# Altium PCB optical_sensor_v1.1.PcbDoc
Units mm, origin at the board's own origin, x right, y up, seen from the top; angles counter-clockwise.
Board outline 29.57 x 17.04 mm, 2 copper layers (Top Layer, Bottom Layer); 20 components, 24 nets, 92 pads, 52 vias.
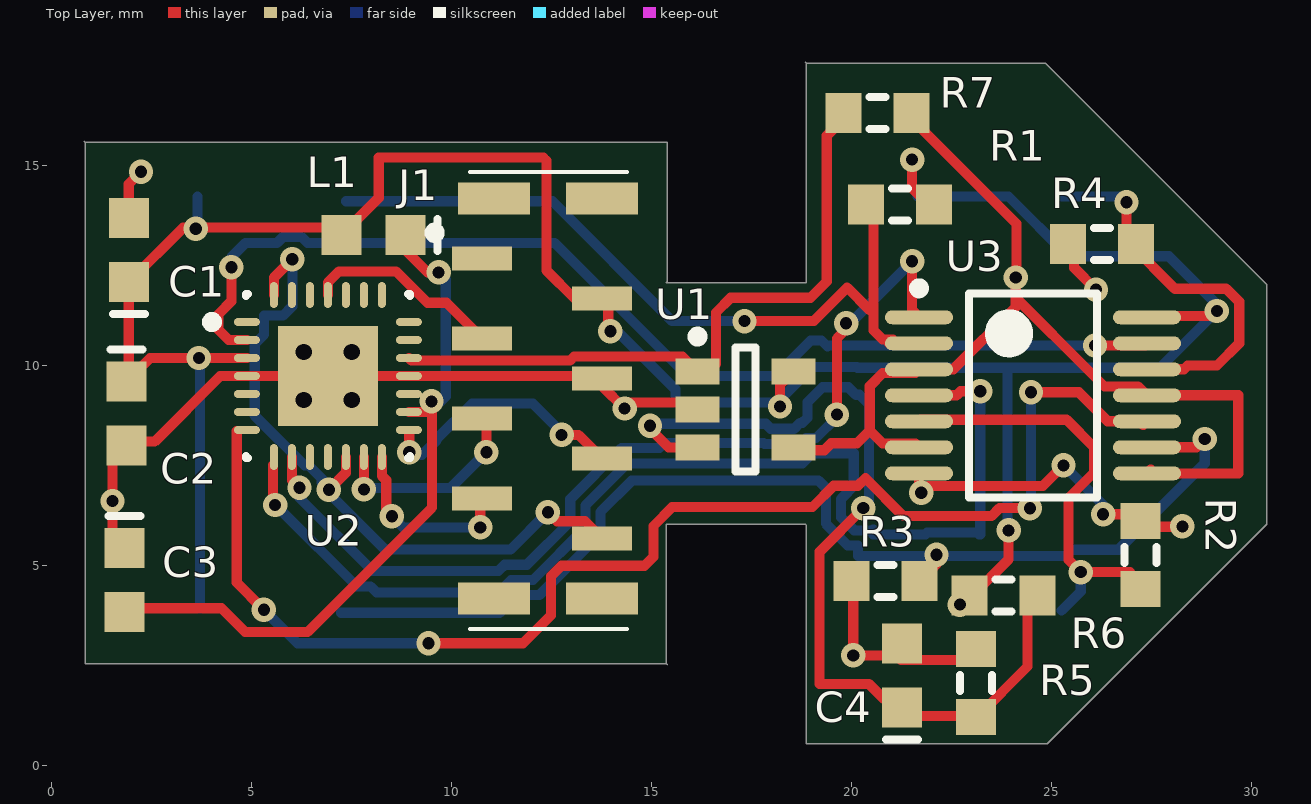
[diagram p0: Top Layer view]
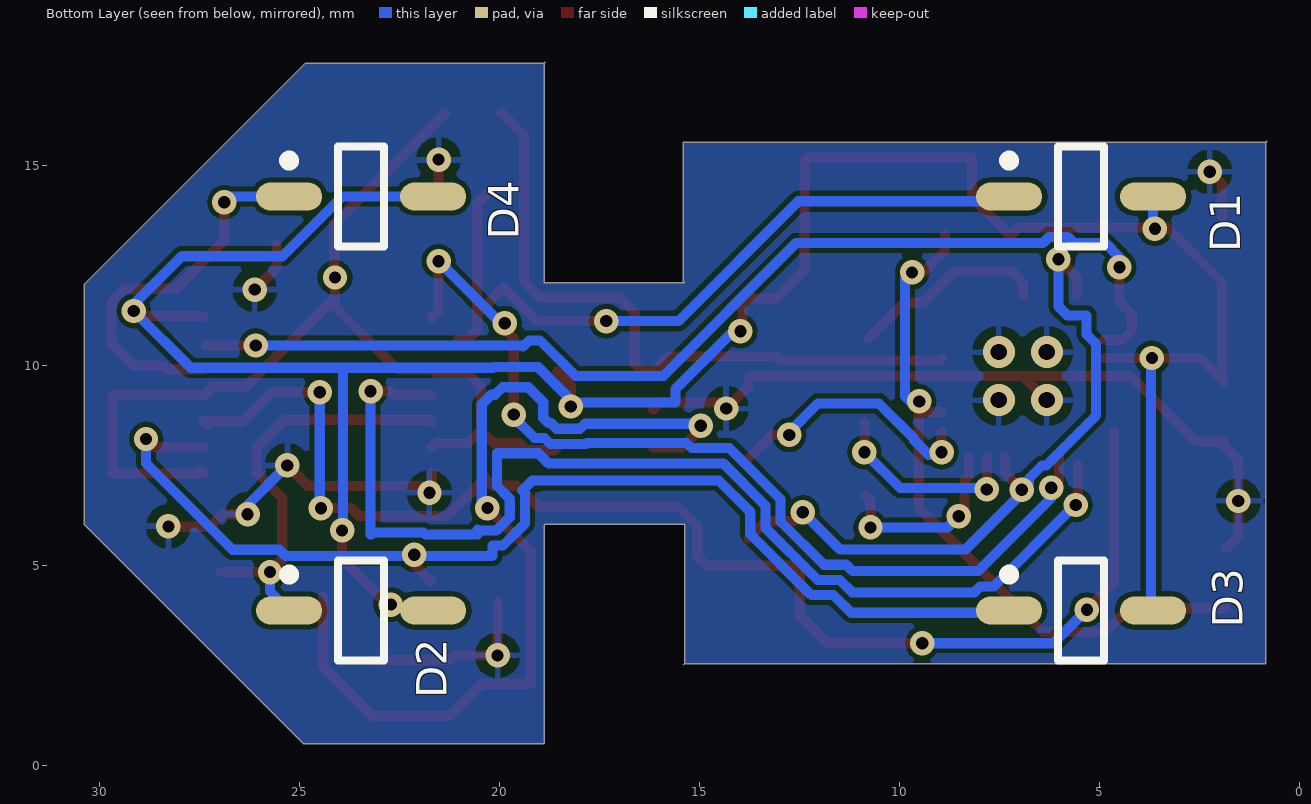
[diagram p1: Bottom Layer view, seen from below]

## Layer stack, top to bottom
Top Solder: solder mask 0.0102, Solder Resist, Dk 3.5
Top Layer: signal copper 0.0356
Dielectric1: dielectric 0.32, FR-4, Dk 4.8
Bottom Layer: signal copper 0.0356
Bottom Solder: solder mask 0.0102, Solder Resist, Dk 3.5

## Board outline
0.851,15.572 0.851,2.542 15.379,2.542 15.405,2.517 15.379,2.542 15.379,6.022 18.859,6.022 18.885,5.996 18.885,0.535 24.904,0.535 30.391,6.022 30.391,12.016 24.854,17.553 24.828,17.553 18.885,17.553 18.859,17.579 18.885,17.553 18.885,12.067 15.379,12.067 15.405,12.092 15.405,15.572 0.851,15.572 0.825,15.598

## Design rules (kind name [scope] priority, off if disabled: settings)
AssemblyTestPointUsage [All] p1 off:
AssemblyTestpoint [All] p1 off: testpointundercomponent=TRUE minsize=1.016 maxsize=2.54 preferedsize=1.524 minholesize=0 maxholesize=1.016 preferedholesize=0.813 testpointgrid=0.025 usegrid=TRUE gridtolerance=0 allowsidetop=TRUE allowsidebottom=TRUE
Clearance [All] p1: gap=0.125
DiffPairsRouting [All] p1: maxlimit=10 minlimit=0.125 mostfreqgap=0.15 toplayer_minwidth=0.381 toplayer_maxwidth=0.381 toplayer_prefwidth=0.381 bottomlayer_minwidth=0.381 bottomlayer_maxwidth=0.381 bottomlayer_prefwidth=0.381 maxuncoupledlength=12.7
FabricationTestPointUsage FabricationTestPointUsage_1 [All] p1 off: valid=0 allowmultiple=FALSE
FabricationTestpoint FabricationTestpoint_1 [All] p1 off: side=3 testpointundercomponent=TRUE minsize=1.016 maxsize=2.54 preferedsize=1.524 minholesize=0 maxholesize=1.016 preferedholesize=0.813 testpointgrid=0.025 allowsidetop=TRUE allowsidebottom=TRUE usegrid=TRUE gridtolerance=0
HoleSize [All] p1: absolutevalues=TRUE maxlimit=6 minlimit=0.2 maxpercent=80.000 minpercent=20.000
HoleSize FabricationTestpoint [All] p2 off: absolutevalues=TRUE maxlimit=2.54 minlimit=0.025 maxpercent=80.000 minpercent=20.000
HoleSize FabricationTestPointUsage [All] p3 off: absolutevalues=TRUE maxlimit=2.54 minlimit=0.025 maxpercent=80.000 minpercent=20.000
MinimumSolderMaskSliver [All] p1 off: minsoldermaskwidth=0.254
PlaneClearance [All] p1: clearance=0.5
PlaneConnect [All] p1: planeconnectstyle=Relief reliefexpansion=0.4 reliefentries=4 reliefconductorwidth=0.15 reliefairgap=0.15
PolygonConnect [All] p1: connectstyle=Relief reliefconductorwidth=0.15 reliefentries=4 polygonreliefangle="90 Angle" airgapwidth=0.254
RoutingCorners [All] p1: cornerstyle=45-Degree minsetback=1.25 maxsetback=1.25
RoutingVias [All] p1: holewidth=0.3 width=0.6 viastyle="Through Hole" minholewidth=0.2 minwidth=0.45 maxholewidth=0.45 maxwidth=0.75
SilkToSolderMaskClearance SilkscreenOverComponentPads [IsPad] p1: minsilkscreentomaskgap=0.1 clearancetoexposedcopper=FALSE
SolderMaskExpansion [All] p1: expansion=0.075
Width [All] p1: maxlimit=10 minlimit=0.125 preferedwidth=0.15
18 further rules are at their usual default settings.

## Components (designator, comment, footprint, x,y, rotation, side; value= is the part's Value field where it differs from the comment)
C1 "Cap Semi" CAPC1608N 1.943,12.88 r90 top
C2 "Cap Semi" CAPC1608N 1.892,8.79 r270 top
C3 "BypassCap" CAPC1608N 1.841,4.625 r270 top
C4 "Cap Semi" CAPC1608N 21.272,2.237 r90 top
D1 "Photo Diode" "Vishay VEMD/VSMB footprint" 5.464,14.216 r180 bottom (schematic designator D2)
D2 "Photo Diode" "Vishay VEMD/VSMB footprint" 23.464,3.866 r180 bottom
D3 "Photo Diode" "Vishay VEMD/VSMB footprint" 5.464,3.866 r180 bottom (schematic designator D2)
D4 "Photo Diode" "Vishay VEMD/VSMB footprint" 23.464,14.216 r180 bottom (schematic designator D2)
J1 "FFC 8-PIN Connector (1mm)" "Hirose FFC connector 8-Pin" 13.779,4.168 r90 top
L1 "Inductor" INDC1608N 8.064,13.261 r180 top
R1 "Rlevel" RESC1608N 21.221,14.023 r180 top
R2 "Rlevel" RESC1608N 27.241,5.26 r270 top
R3 "Rlevel" RESC1608N 20.866,4.599 r0 top
R4 "Rlevel" RESC1608N 26.276,13.032 r0 top
R5 "Rlevel" RESC1608N 23.126,2.059 r270 top
R6 "Rlevel" RESC1608N 23.812,4.244 r180 top
R7 "Rlevel" RESC1608N 20.663,16.309 r0 top
U1 "MCP6021T-E/OT" SOT-23-OT5_N 17.361,8.892 r0 top
U2 "ATmega168-28M1" PCBComponent_1 6.921,9.73 r0 top
U3 "SN74CBT3126PWLE" PW014_N 24.549,9.248 r0 top

## Footprints (in the part's own frame and the unit in brackets; to place one, negate y for a bottom-side part, rotate by r counter-clockwise, add the part's x,y. Pads: shape width x height; smd on the part's side, far side on the other; paste and mask are expansions set on the pad)
CAPC1608N [mm] "Chip Capacitor, Body 1.6x0.8mm, IPC Medium Density"
  rect 1x1 smd: 1(-0.8,0) 2(0.8,0)
  silkscreen extent -1.6,-0.4 -1.6,0.4, body extent -0.87,-0.48 0.87,0.48, height 0.85
"Hirose FFC connector 8-Pin" [mm] "Hirose FFC connector 8-Pin (FH12-8S-1SV)"
  rect 0.8x1.8 smd: 0(0,2.7) 0(0,0) 0(10,0) 0(10,2.7)
  rect 0.6x1.5 smd: 1(8.5,3) 2(7.5,0) 3(6.5,3) 4(5.5,0) 5(4.5,3) 6(3.5,0) 7(2.5,3) 8(1.5,0)
  silkscreen extent -0.76,-0.63 10.67,4.32
INDC1608N [mm] "Chip Inductor, Body 1.6x0.8mm, IPC Medium Density"
  rect 1x1 smd: 1(-0.8,0) 2(0.8,0)
  silkscreen extent -1.6,-0.4 -1.6,0.4, body extent -0.87,-0.48 0.87,0.48, height 0.71
PCBComponent_1 [mm]
  oval 0.65x0.2 smd mask+0.06: 1(-2.025,1.35) 2(-2.025,0.9) 3(-2.025,0.45) 4(-2.025,0) 5(-2.025,-0.45) 6(-2.025,-0.9) 7(-2.025,-1.35) 15(2.025,-1.35) 16(2.025,-0.9) 17(2.025,-0.45) 18(2.025,0) 19(2.025,0.45) 20(2.025,0.9) 21(2.025,1.35)
  oval 0.2x0.65 smd mask+0.06: 8(-1.35,-2.025) 9(-0.9,-2.025) 10(-0.45,-2.025) 11(0,-2.025) 12(0.45,-2.025) 13(0.9,-2.025) 14(1.35,-2.025) 22(1.35,2.025) 23(0.9,2.025) 24(0.45,2.025) 25(0,2.025) 26(-0.45,2.025) 27(-0.9,2.025) 28(-1.35,2.025)
  rect 2.5x2.5 smd: 29(0,0)
  silkscreen extent -3.02,-2.05 2.05,2.05, body extent -2.02,-2.02 2.02,2.02, height 1
PW014_N [mm] "TSOP, 14-Leads, Body 5x4.4mm, Pitch 0.65mm, IPC Medium Density"
  oval 1.7x0.35 smd: 1(-2.85,1.95) 2(-2.85,1.3) 3(-2.85,0.65) 4(-2.85,0) 5(-2.85,-0.65) 6(-2.85,-1.3) 7(-2.85,-1.95) 8(2.85,-1.95) 9(2.85,-1.3) 10(2.85,-0.65) 11(2.85,0) 12(2.85,0.65) 13(2.85,1.3) 14(2.85,1.95)
  silkscreen extent -2.97,-2.55 1.6,2.8, body extent -2.25,-2.55 2.25,2.55, height 1.2
RESC1608N [mm] "Chip Resistor, Body 1.6x0.8mm, IPC Medium Density"
  rect 0.9x1 smd: 1(-0.85,0) 2(0.85,0)
  silkscreen extent -0.2,-0.4 0.2,0.4, body extent -0.85,-0.48 0.85,0.48, height 0.6
SOT-23-OT5_N [mm] "SOT23, 5-Leads, Body 2.9x1.6mm, Pitch 0.95mm, Lead Span 2.7mm, IPC Medium Density"
  rect 1.1x0.65 smd: 1(-1.2,0.95) 2(-1.2,0) 3(-1.2,-0.95) 4(1.2,-0.95) 5(1.2,0.95)
  silkscreen extent -1.32,-1.55 0.25,1.95, body extent -0.9,-1.55 0.9,1.55, height 1.45
"Vishay VEMD/VSMB footprint" [mm] "SOP, 2-Leads, Body 2.30x2.30mm, Pitch 1.27mm, IPC Medium Density"
  oval 1.65x0.7 smd: 1(-1.8,0) 2(1.8,0)
  silkscreen extent -1.92,-1.25 0.58,1.25, body extent -1.25,-1.25 1.25,1.25, height 2.97

## Part data
C1 C2 C4: "Capacitor (Semiconductor SIM Model)"
C3: library part "Cap Semi", "Capacitor (Semiconductor SIM Model)"
D1 D2 D3 D4: library part Diode, "Default Diode"
J1: library part "FFC Connector-8Pin-SMT-1mm", "FFC 8-PIN Connector (1mm) (SMT)"
R1 R2 R3 R4 R5 R6 R7: library part Res3, "Resistor"
U1: "Rail-to-Rail Input/Output, 10 MHz Operational Amplifier, 5-Pin SOT-23, Extended Temperature, Tape and Reel"
U2: "8-Bit AVR Microcontroller with 8K Bytes of In-System Programmable Flash Memory"
U3: "Quadruple FET Bus Switch"

## Via types
v1: diameter 0.61, hole 0.305, Top Layer to Bottom Layer, tented both sides, 47 vias
v2: diameter 0.8, hole 0.41, Top Layer to Bottom Layer, tented both sides, 4 vias
v3: diameter 0.61, hole 0.305, Top Layer to Bottom Layer, tented bottom, 1 vias

## Nets (pads, with @x,y where several pads share a name; then routed paths per layer and width w, separated by ;. In a path a pad name is that pad's centre, name@x,y a point inside that pad or via, vN(x,y) a via of type N, cw(c..) or ccw(c..) an arc to the next point about the centre after c; other vN are vias at no path point)
ADC0: R7.1 U1.1 U2.19 | length 16.8
  Top Layer w0.254: U2.19 9.011,10.116 12.971,10.116 13.075,10.22 15.783,10.22 ; 15.822,10.18 U1.1 16.428,9.842 16.624,10.038 16.624,11.317 16.993,11.686 18.986,11.686 19.393,12.092 19.393,15.739 R7.1@19.963,16.309
AREF: C3.2 L1.1 U2.16 U2.17 | length 17
  Top Layer w0.254: C3.2@1.841,3.925 4.263,3.925 4.857,3.331 6.415,3.331 9.523,6.439 v1@9.523,9.084 ; L1.1 8.864,12.867 9.41,12.321 v1(9.69,12.321) ; U2.16 9.361,8.83
  Bottom Layer w0.254: v1(9.512,9.095) 9.741,9.095 9.868,9.222 v1@9.868,12.143
CS: J1.8 U2.12 U2.28 | length 17.5
  Top Layer w0.254: U2.28 5.571,12.19 v1(6.032,12.651) ; v1(6.947,6.885) 7.371,7.31 U2.12 ; v1(12.421,6.325) 12.648,6.098 13.349,6.098 J1.8
  Bottom Layer w0.254: v1(6.032,12.651) 6.032,11.474 5.797,11.239 5.327,11.239 5.327,10.769 5.092,10.534 5.092,8.74 6.339,7.493 6.441,7.493 6.767,7.167 6.767,7.065 v1(6.947,6.885) 6.947,6.801 8.359,5.389 11.485,5.389 v1(12.421,6.325)
D1: D1.1 R1.2 U3.2 | length 18.8
  Top Layer w0.254: v1@17.538,11.106 19.067,11.106 19.903,11.942 20.468,11.377 ; R1.2@20.371,14.226 20.561,14.036 20.561,10.874 20.793,10.642 21.044,10.642 U3.2@20.95,10.548
  Bottom Layer w0.254: D1.1@7.381,14.099 12.535,14.099 15.532,11.102 v1(17.335,11.102)
D2: D2.1 R2.2 U3.5 | length 10.6
  Top Layer w0.254: U3.5 21.737,8.636 25.389,8.636 26.073,7.952 26.073,7.317 25.438,6.682 25.438,5.133 v1(25.743,4.828) R2.2@26.973,4.828
  Bottom Layer w0.254: D2.1 25.743,4.345 v1(25.743,4.828)
D3: D3.1 R3.2 U3.9 | length 28.4
  Top Layer w0.254: R3.2 22.136,5.019 v1(22.136,5.26) ; U3.9 v1@28.634,7.948
  Bottom Layer w0.254: D3.1@7.251,3.812 11.214,3.812 11.654,4.252 12.208,4.252 13.736,5.78 13.736,6.334 14.516,7.114 19.189,7.114 19.428,6.875 19.422,6.869 19.422,6.867 19.371,6.816 19.371,6.041 19.919,5.492 20.177,5.492 20.177,5.234 25.361,5.234 25.512,5.385 26.68,5.385 28.841,7.546 v1(28.841,8.155)
D4: D4.1 R4.2 U3.12 | length 9.4
  Top Layer w0.254: R4.2@26.886,13.123 v1(26.886,14.074) ; R4.2@26.976,13.032 28.096,11.913 29.377,11.913 29.703,11.586 29.703,10.545 29.148,9.991 28.414,9.991 28.321,9.898 U3.12
  Bottom Layer w0.254: D4.1 v1@26.743,14.216
GND: C1.2 C2.2 C3.1 C4.2 J1.4 R1.1 R2.1 R3.1 R4.1 R5.1 U1.2 U2.4 U2.18 U2.29 U3.7 | length 35.1
  Top Layer w0.254: C3.1 1.536,5.73 v1(1.536,6.606) 1.536,7.635 C2.2 ; C2.2@1.892,8.09 2.589,8.09 4.229,9.73 U2.4 U2.29 ; C1.2 1.943,14.531 v1(2.248,14.836) ; U2.29@6.471,9.28 U2.29 ; U1.2 15.981,9.072 14.492,9.072 v1(14.338,8.917) 13.779,9.476 J1.4 13.717,9.73 U2.18 U2.29 ; 20.053,4.08 v1(20.053,2.745) C4.2@21.134,2.745 ; C4.2@21.247,2.632 R5.1@23.126,2.632 ; v1(21.526,15.14) 21.526,14.418 R1.1@21.921,14.023 ; v1@21.699,6.967 U3.7 ; v1(21.755,6.809) 21.929,6.983 24.799,6.983 v1(25.311,7.495) ; R4.1@25.576,13.032 25.576,12.437 v1(26.124,11.889) ; v1(26.301,6.276) 26.925,6.276 27.241,5.96 v1@28.271,5.96
  Bottom Layer w0.254: v1(25.311,7.495) 26.301,6.504 v1(26.301,6.276)
  other v1: 28.283,5.971
  other v2: 6.321,9.13 7.521,9.13 6.321,10.33 7.521,10.33
MISO: J1.7 U2.14 | length 4.5
  Top Layer w0.254: U2.14 8.271,7.234 8.378,7.127 v1@8.378,6.368 ; v1(10.731,5.946) J1.7@10.731,6.62 ; J1.7 J1.7@10.858,6.747
  Bottom Layer w0.254: v1(8.521,6.225) 8.801,5.946 v1(10.731,5.946)
MOSI: J1.5 U2.13 | length 5
  Top Layer w0.254: v1(7.821,6.896) U2.13 ; v1(10.884,7.825) J1.5@10.884,8.563
  Bottom Layer w0.254: v1(7.821,6.896) 7.859,6.934 9.993,6.934 v1(10.884,7.825)
NetC4_1: C4.1 R5.2 R6.1 U1.3 | length 23.8
  Top Layer w0.254: v1(14.973,8.486) 14.951,8.486 14.901,8.536 15.051,8.386 15.024,8.359 15.44,7.942 U1.3 ; v1(20.307,6.428) 19.215,5.336 19.215,2.034 20.445,2.034 21.247,1.232 R5.2@23.126,1.232 ; R5.2@23.152,1.207 24.411,2.466 R6.1@24.411,4.218
  Bottom Layer w0.254: v1@14.901,8.536 15.004,8.433 14.901,8.536 17.868,8.536 17.993,8.411 18.577,8.411 18.723,8.558 18.784,8.558 18.91,8.684 18.91,9.074 19.286,9.451 19.931,9.451 20.121,9.261 20.21,9.261 20.448,9.022 v1@20.448,6.428 ; v1@14.951,8.486 v1(14.973,8.486) ; v1@20.18,6.555 v1(20.307,6.428)
NetD1_1: 
NetD2_1: 
NetD3_1: 
NetD4_1: 
NetR5_2: 
RESET_PROGRAMMER: J1.3 U2.25 | length 5
  Top Layer w0.254: U2.25 6.921,12.067 7.201,12.346 8.625,12.346 9.412,11.56 9.887,11.56 J1.3
S1: U2.9 U3.1 | length 23.5
  Top Layer w0.254: U2.9 6.021,7.125 v1(6.21,6.936) ; v1(19.647,8.765) 19.647,10.67 19.951,10.975 v1(19.875,11.051) ; v1(21.526,12.6) 21.526,11.37 U3.1
  Bottom Layer w0.254: v1(6.21,6.936) 6.21,6.682 8.039,4.853 11.183,4.853 11.34,5.01 11.894,5.01 12.978,6.094 12.978,6.648 14.259,7.929 15.204,7.929 15.329,8.054 17.815,8.054 17.837,8.032 18.734,8.032 18.88,8.179 19.123,8.179 19.647,8.702 v1(19.647,8.765) ; v1@19.926,11 v1(21.526,12.6)
S2: U2.8 U3.4 | length 28.6
  Top Layer w0.254: v1@5.546,6.504 U2.8@5.546,7.502 ; U3.4 22.639,9.248 22.741,9.349 v1(23.228,9.349)
  Bottom Layer w0.254: v1@5.733,6.383 7.649,4.468 7.988,4.468 8.136,4.32 11.186,4.32 11.497,4.631 12.051,4.631 13.357,5.937 13.357,6.491 14.412,7.546 18.783,7.546 19.037,7.8 20.069,7.8 20.069,6.98 19.801,6.712 19.801,6.71 19.75,6.659 19.75,6.197 20.076,5.871 20.538,5.871 20.556,5.89 20.556,5.768 21.856,5.768 21.905,5.817 23.154,5.817 23.203,5.768 ; 23.228,5.768 v1(23.228,9.349)
  other v1: 5.6,6.504
S3: U2.7 U3.10 | length 34.2
  Top Layer w0.254: U2.7@4.642,8.349 4.642,4.567 v1(5.321,3.888) v1@5.321,3.99 ; v3(9.436,3.05) 9.436,3.228 9.614,3.05 11.8,3.05 12.498,3.748 12.498,4.725 12.759,4.987 14.837,4.987 15.06,5.21 15.06,5.982 15.532,6.454 19.037,6.454 19.568,6.985 20.171,6.985 20.36,7.175 21.308,6.227 23.509,6.227 23.708,6.426 v1(24.471,6.426) ; v1(24.498,9.324) 25.692,9.324 26.418,8.598 U3.10 U3.10@27.305,8.504
  Bottom Layer w0.254: v1@5.423,3.99 v1(5.321,3.888) 6.159,3.05 v3(9.436,3.05) ; v1(24.471,6.426) 24.498,6.454 v1(24.498,9.324)
S4: U2.2 U3.13 | length 27.7
  Top Layer w0.254: v1(4.508,12.448) 4.508,11.597 4.19,11.279 4.19,10.881 4.441,10.63 U2.2 ; v1(26.098,10.492) U3.13@27.343,10.492
  Bottom Layer w0.254: v1(4.508,12.448) 4.508,12.702 4.864,13.058 5.651,13.058 5.801,13.208 6.263,13.208 6.413,13.058 12.585,13.058 15.913,9.73 18.102,9.73 18.991,10.619 19.261,10.619 19.413,10.467 19.439,10.492 v1(26.098,10.492)
SCK: J1.6 U2.15 | length 6.5
  Top Layer w0.254: U2.15@8.946,8.349 8.953,8.342 v1(8.953,7.825) ; v1(12.763,8.257) 13.19,8.257 J1.6
  Bottom Layer w0.254: v1(8.953,7.825) 9.019,7.759 9.273,7.759 9.639,8.124 9.639,8.16 10.523,9.044 12.046,9.044 12.763,8.327 v1(12.763,8.257)
V-: R7.2 U1.4 U3.3 U3.6 U3.8 U3.11 | length 26.1
  Top Layer w0.254: U1.4 18.638,7.865 18.649,7.876 19.33,7.876 19.378,7.924 19.503,8.049 20.15,8.049 20.468,8.367 ; R7.2@21.363,16.309 24.137,13.535 24.137,12.214 v1(24.117,12.194) 24.117,11.686 ; U3.6 21.605,8.042 20.793,8.042 20.468,8.367 ; U3.8 U3.8@27.493,7.392 ; U3.8@27.405,7.292 29.68,7.292 29.68,9.248 U3.11 27.176,9.471 26.332,9.471 26.325,9.478 25.999,9.804 24.117,11.686 ; 20.468,8.367 20.468,9.478 20.793,9.804 21.605,9.804 U3.3 22.557,9.898 24.117,11.457 24.117,11.686
VCC: C1.1 C2.1 D1.2 D2.2 D3.2 D4.2 J1.2 L1.2 R6.2 U1.5 U2.3 U3.14 | length 65.2
  Top Layer w0.254: C2.1 C2.1@1.943,9.641 ; U2.3 v1(3.695,10.18) 2.482,10.18 C2.1@1.943,9.641 ; L1.2@7.264,13.21 7.036,13.439 3.302,13.439 C1.1 C2.1@1.943,9.641 ; L1.2 8.191,14.188 8.191,15.191 12.306,15.191 ; 12.382,15.115 12.382,12.372 13.086,11.668 J1.2 ; J1.2@13.932,11.515 13.932,10.899 v1(13.982,10.848) ; v1(18.224,8.968) 18.224,9.506 U1.5 ; R6.2 22.985,4.244 23.011,4.218 23.939,5.147 v1(23.939,5.869) ; U3.14 27.435,11.233 v1@28.973,11.233
  Bottom Layer w0.254: v1@3.664,13.458 D1.2 ; v1(3.695,10.18) 3.721,10.155 D3.2@3.721,3.923 ; v1(13.982,10.848) 13.982,11.026 15.608,9.4 15.608,9.07 18.123,9.07 v1(18.224,8.968) 18.224,9.134 19.049,9.959 20.141,9.959 20.164,9.935 27.726,9.935 v1(29.146,11.356) 29.146,11.525 27.946,12.725 25.428,12.725 23.938,14.216 D4.2 ; v1@23.914,5.869 23.914,9.883
  other v1: 22.72,4.015 3.619,13.413
pads on no net: J1.0 J1.1 U2.1 U2.5 U2.6 U2.10 U2.11 U2.20 U2.21 U2.22 U2.23 U2.24 U2.26 U2.27

## Polygon pours and split planes (outlines as drawn)
GND on Bottom Layer "GND-Bottom" (solid, pour order 4): 0.851,15.572 0.851,2.542 15.379,2.542 15.405,2.517 15.379,2.542 15.379,6.022 18.859,6.022 18.885,5.996 18.885,0.535 24.904,0.535 30.391,6.022 30.391,12.016 24.854,17.553 24.828,17.553 18.885,17.553 18.859,17.579 18.885,17.553 18.885,12.067 15.379,12.067 15.405,12.092 15.405,15.572 0.851,15.572 0.825,15.598